# EAGLE board Batterycharger005.connectors (EAGLE 7.1.0)
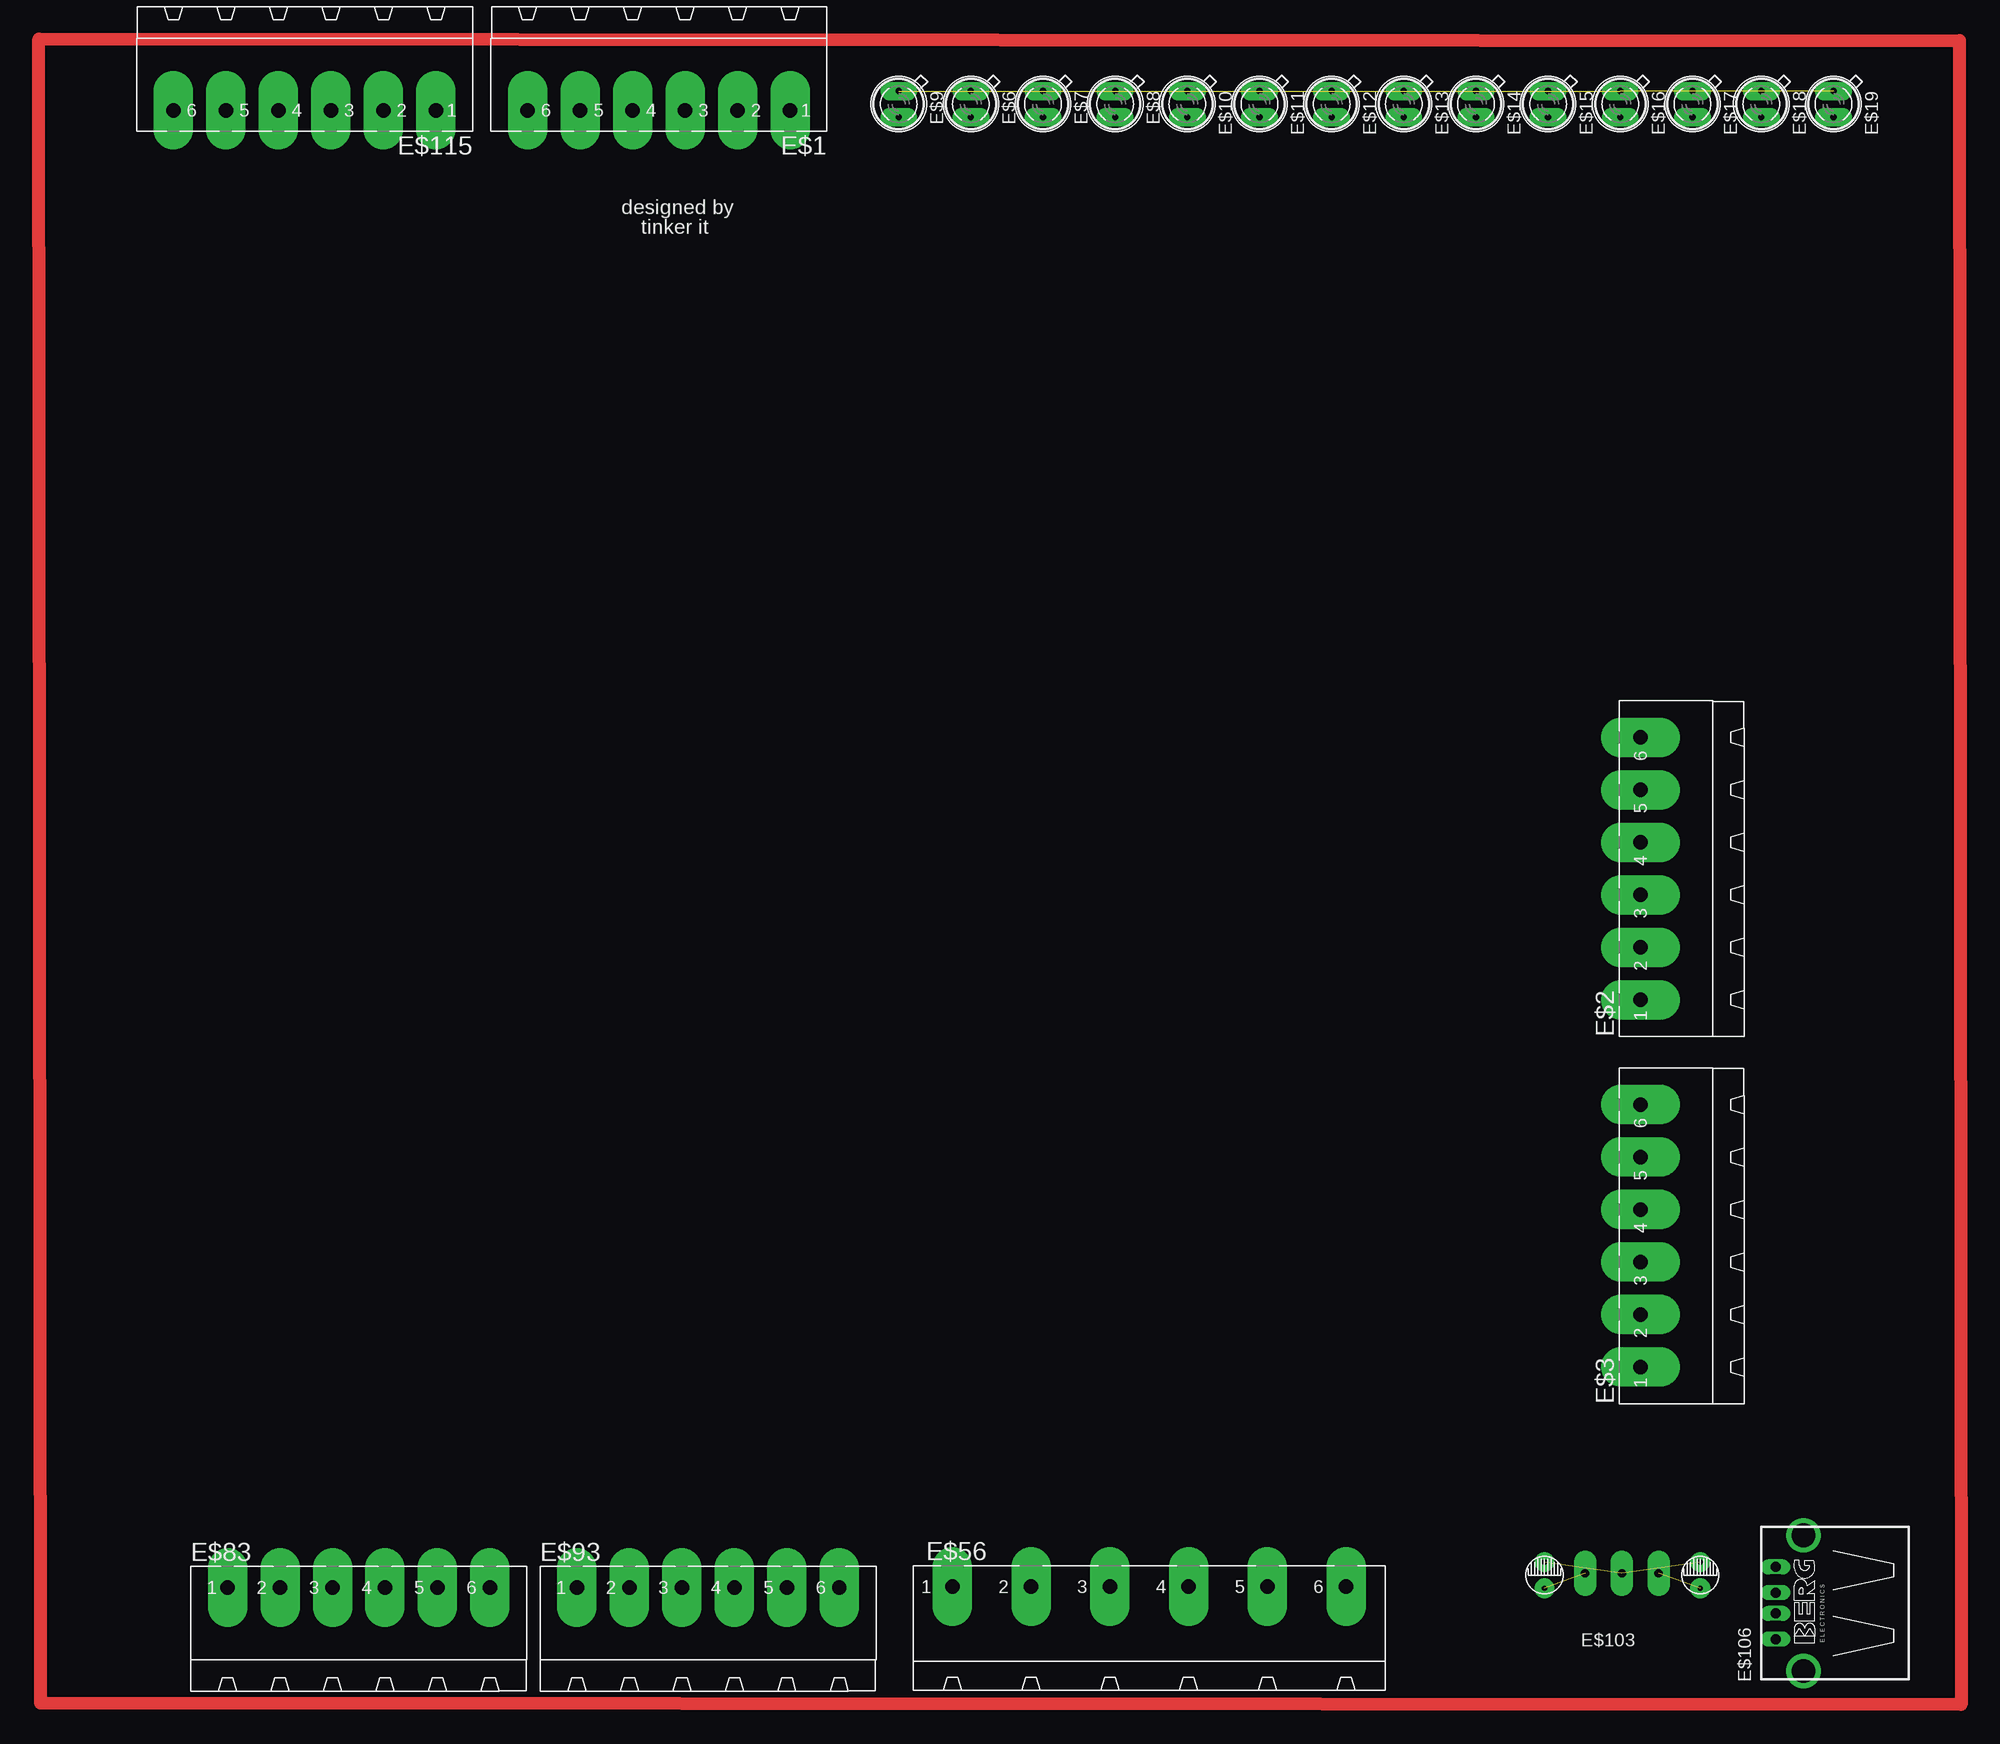
[diagram p0: board, top side]
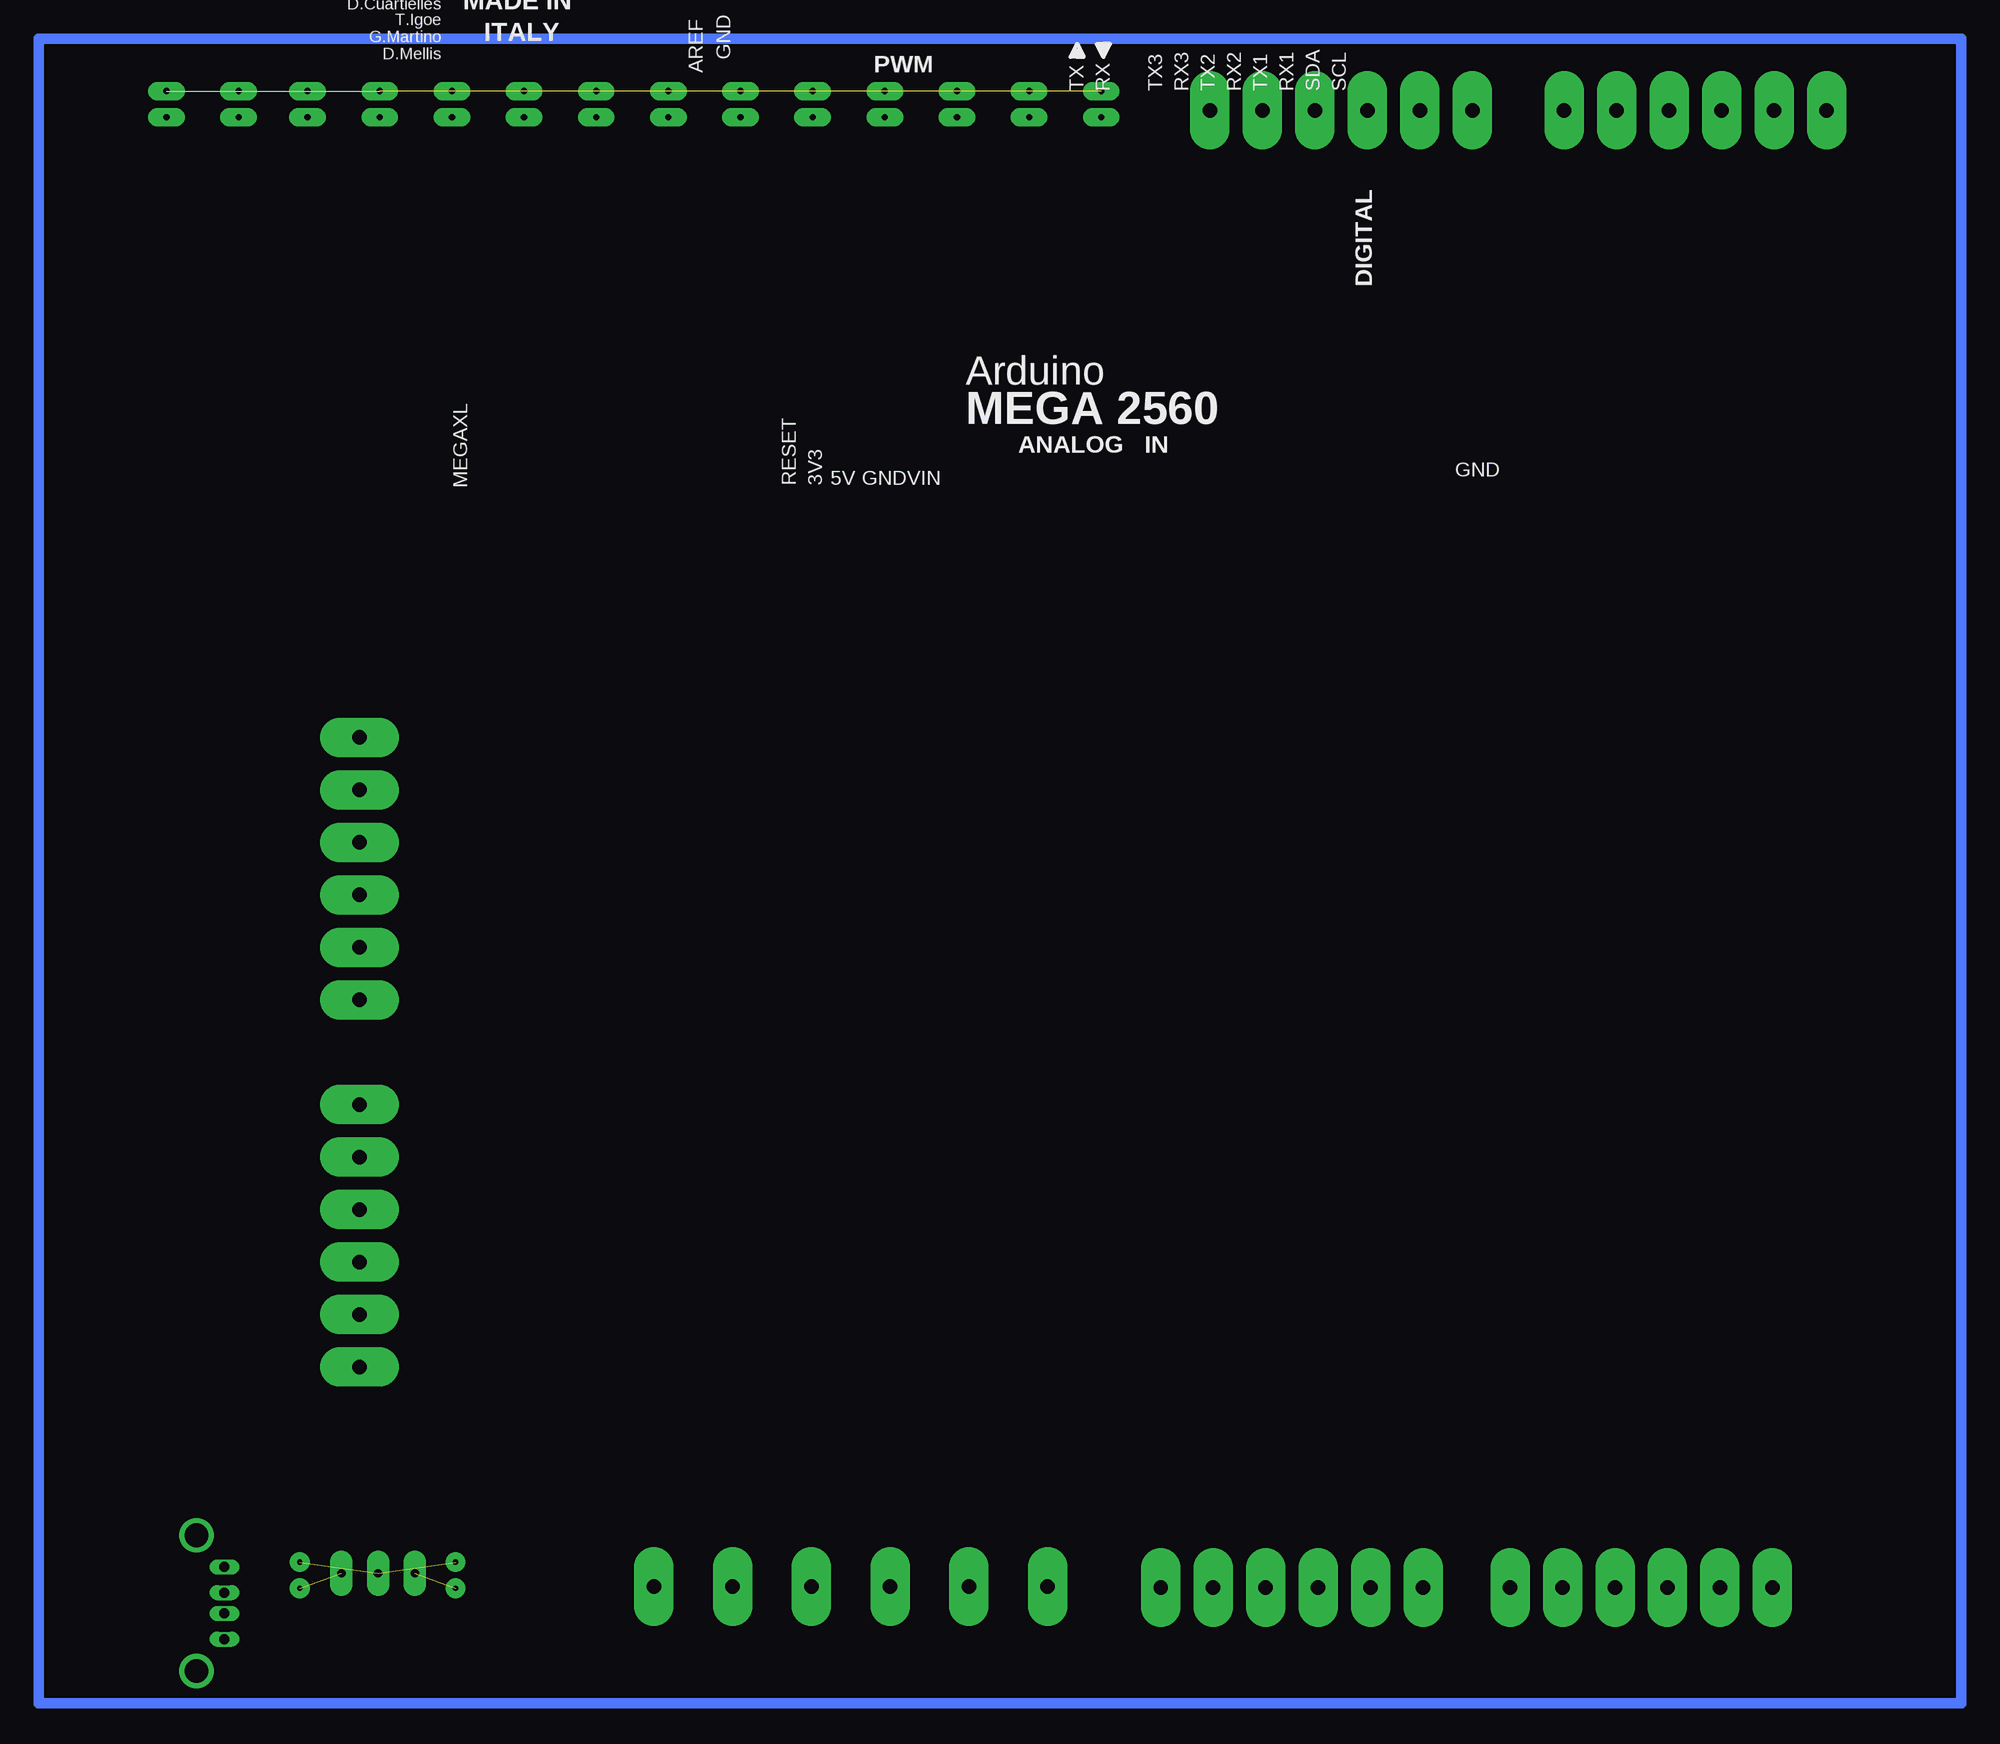
[diagram p1: board, bottom side, seen from below]

No outline drawn. Coordinates in mm, seen from the top.
Copper layers (1*16): Top 0.035mm / dielectric 1.5mm / Bottom 0.035mm
Design rules "default *": minimum track width 0.15mm, minimum drill 0.3mm, track to track 0.15mm, track to pad 0.1mm, pad to pad 0.15mm, via to via 0.15mm, smd to smd 0.15mm, copper to edge 0.6mm, drill to drill 0.3mm, minimum pad ring 10mil, minimum via ring 10mil, stop-mask expansion 2mil, vias tented up to drill 1mil, thermal gap 10mil

## Footprints (pad centres in the part's own frame; a part is rotated, then mirrored left to right if it is on the bottom)
CONNECTOR-1X6 = drill 1.397 pad 3.81 long: 1 -12.7,0; 2 -7.62,0; 3 -2.54,0; 4 2.54,0; 5 7.62,0; 6 12.7,0
SFH480 = drill 0.61 pad 1.778 long: A 1.27,0; K -1.27,0
SCREW_TERMINAL_01 = drill 1.397 pad 3.81 long: 1 -19.05,5.08; 2 -11.43,5.08; 3 -3.81,5.08; 4 3.81,5.08; 5 11.43,5.08; 6 19.05,5.08
TIP122 = drill 0.813 pad 2.184 long: 1 -3.556,0; 2 0,0; 3 3.556,0
C2-3 = drill 0.5 pad 1.93: P$1 1.27,0; P$2 -1.27,0
PN87520-S = drill 0.95 long: 1 -3.5,2.71; 2 -1,2.71; 3 1,2.71; 4 3.5,2.71 | drill 2.3 pad 2.9: S1 -6.57,0; S2 6.57,0

## Placement (x,y rotation side)
E$1  [CONNECTOR-1X6]  -87.15,40.56 180 top
E$2  [CONNECTOR-1X6]  7.86,-32.86 90 top
E$3  [CONNECTOR-1X6]  7.86,-68.42 90 top
E$6  [SFH480]  -56.96,41.16 270 top
E$7  [SFH480]  -49.97,41.16 270 top
E$8  [SFH480]  -42.99,41.16 270 top
E$9  [SFH480]  -63.94,41.16 270 top
E$10  [SFH480]  -36,41.16 270 top
E$11  [SFH480]  -29.02,41.16 270 top
E$12  [SFH480]  -22.03,41.16 270 top
E$13  [SFH480]  -15.05,41.16 270 top
E$14  [SFH480]  -8.06,41.16 270 top
E$15  [SFH480]  -1.08,41.16 270 top
E$16  [SFH480]  5.91,41.16 270 top
E$17  [SFH480]  12.89,41.16 270 top
E$18  [SFH480]  19.56,41.16 270 top
E$19  [SFH480]  26.55,41.16 270 top
E$56  [SCREW_TERMINAL_01]  -39.69,-107.47 0 top
E$83  [CONNECTOR-1X6]  -116.2,-102.47 0 top
E$93  [CONNECTOR-1X6]  -82.39,-102.47 0 top
E$103  [TIP122]  6.06,-101.1 0 top
E$104  [C2-3]  -1.43,-101.28 90 top
E$105  [C2-3]  13.65,-101.28 90 top
E$106  [PN87520-S]  23.65,-103.98 90 top
E$115  [CONNECTOR-1X6]  -121.44,40.56 180 top

## Library data of the parts
E$1-E$3 E$56 E$83 E$93 E$104 E$105 E$115 = PERSONAL
E$6-E$19 = led
E$103 = PERSONAL3
E$106 = con-berg

## Nets
S$2: E$2.5
S$3: E$2.4
S$4: E$2.3
S$5: E$2.2
S$7: E$2.1
S$8: E$3.6
S$9: E$103.1 E$104.P$2
S$11: E$103.2 E$104.P$1 E$105.P$1
S$40: E$3.5
S$41: E$3.4
S$42: E$3.3
S$43: E$3.2
S$44: E$3.1
S$45: E$9.A
S$46: E$6.A
S$47: E$7.A
S$48: E$8.A
S$49: E$10.A
S$50: E$11.A
S$51: E$12.A
S$52: E$13.A
S$53: E$14.A
S$54: E$15.A
S$55: E$16.A
S$56: E$17.A
S$57: E$18.A
S$59: E$19.A
S$80: E$6.K E$7.K E$8.K E$9.K E$10.K E$11.K E$12.K E$13.K E$14.K E$15.K E$16.K E$17.K E$18.K E$19.K
S$86: E$56.3
S$90: E$56.1
S$91: E$56.2
S$92: E$115.5
S$97: E$93.6
S$98: E$93.5
S$103: E$83.5
S$104: E$83.4
S$105: E$83.3
S$106: E$83.2
S$113: E$93.3
S$116: E$93.4
S$119: E$103.3 E$105.P$2
S$121: E$115.3
S$123: E$115.1
S$125: E$1.5

## Tracks (layer width: path | path; a pad name or v marks a point on that pad's centre or on a via)
S$1
  Bottom 1.016: -146.84,47.47 38.89,47.47 38.89,-113.67 -147.16,-113.67 -147.16,47.47
S$9  (1 unrouted)
S$11  (2 unrouted)
S$79
  Top 1.27: -147.16,47.47 38.73,47.31 38.89,-113.82 -147,-113.67 -147.16,47.47
S$80  (13 unrouted)
S$119  (1 unrouted)

## Text on the board
tNames: designed by | tinker it
bNames: 5V | M.Banzi | D.Cuartielles | MADE IN | T.Igoe | G.Martino | ITALY | D.Mellis | GND | PWM | AREF | SCL | SDA | RX1 | TX1 | RX2 | TX2 | RX3 | TX3 | RX | TX | DIGITAL | Arduino | MEGA 2560 | ANALOG IN | GND | VIN | GND | 5V | 3V3 | RESET | MEGAXL
ReferenceLC: L | TX | RX | PC1 | PC2